# EAGLE board 1s (EAGLE 9.1.1)
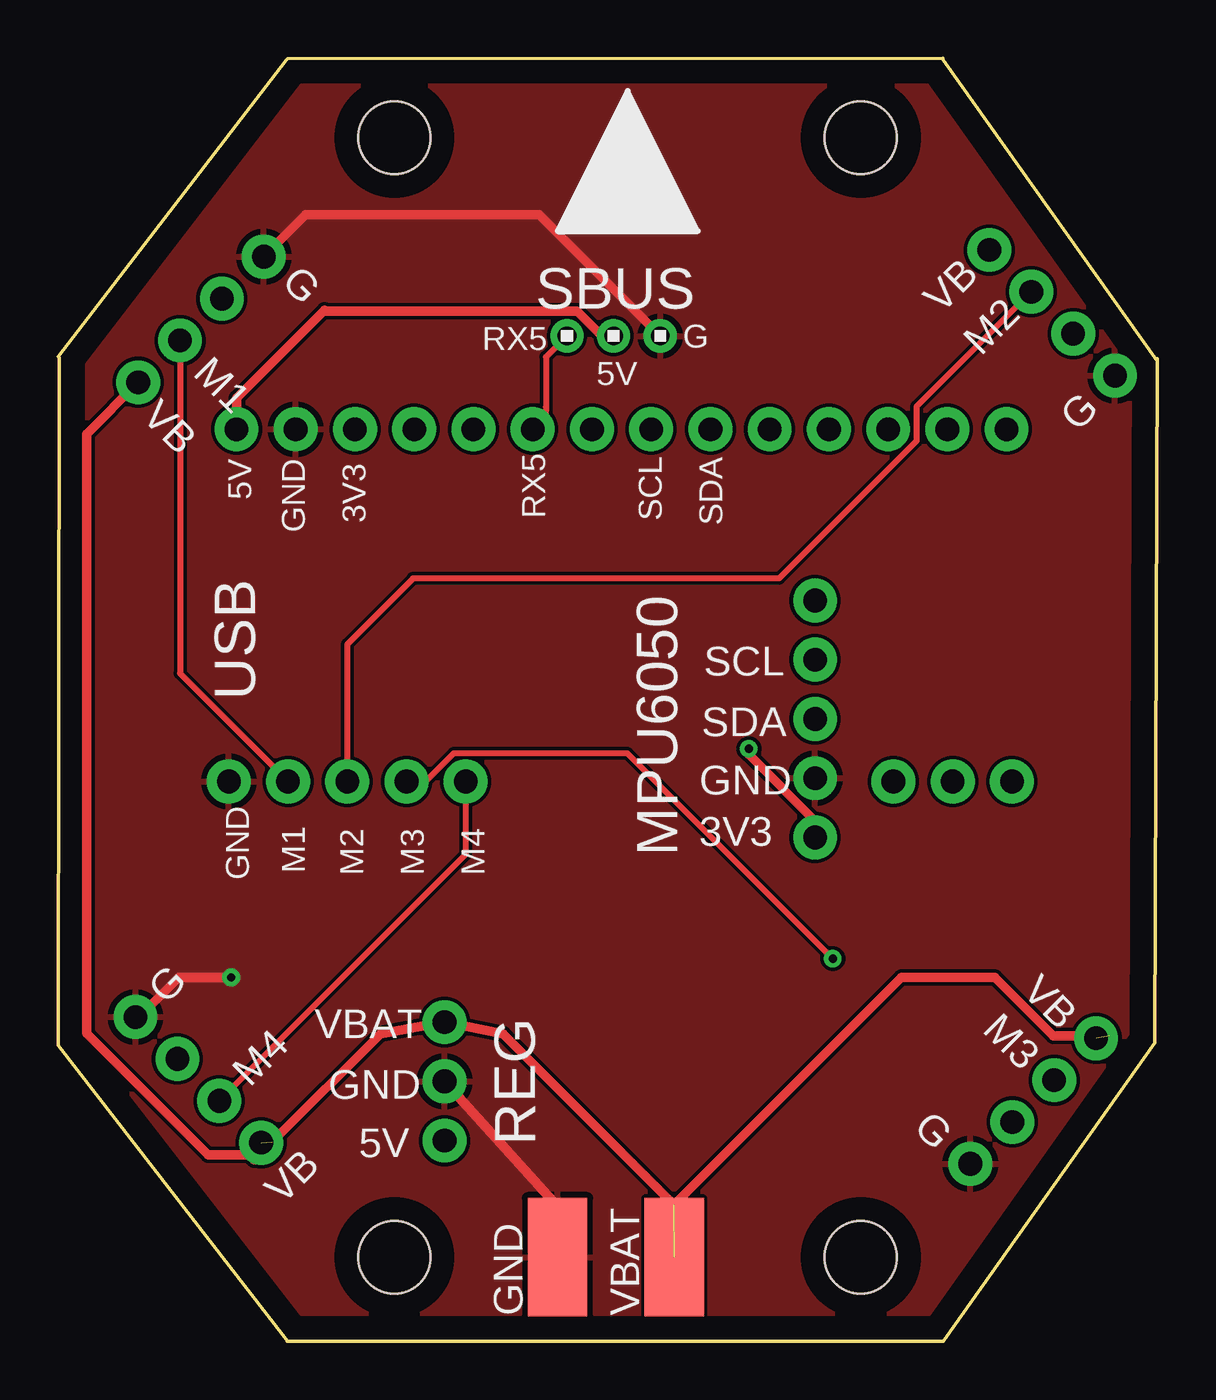
[diagram p0: board, top side]
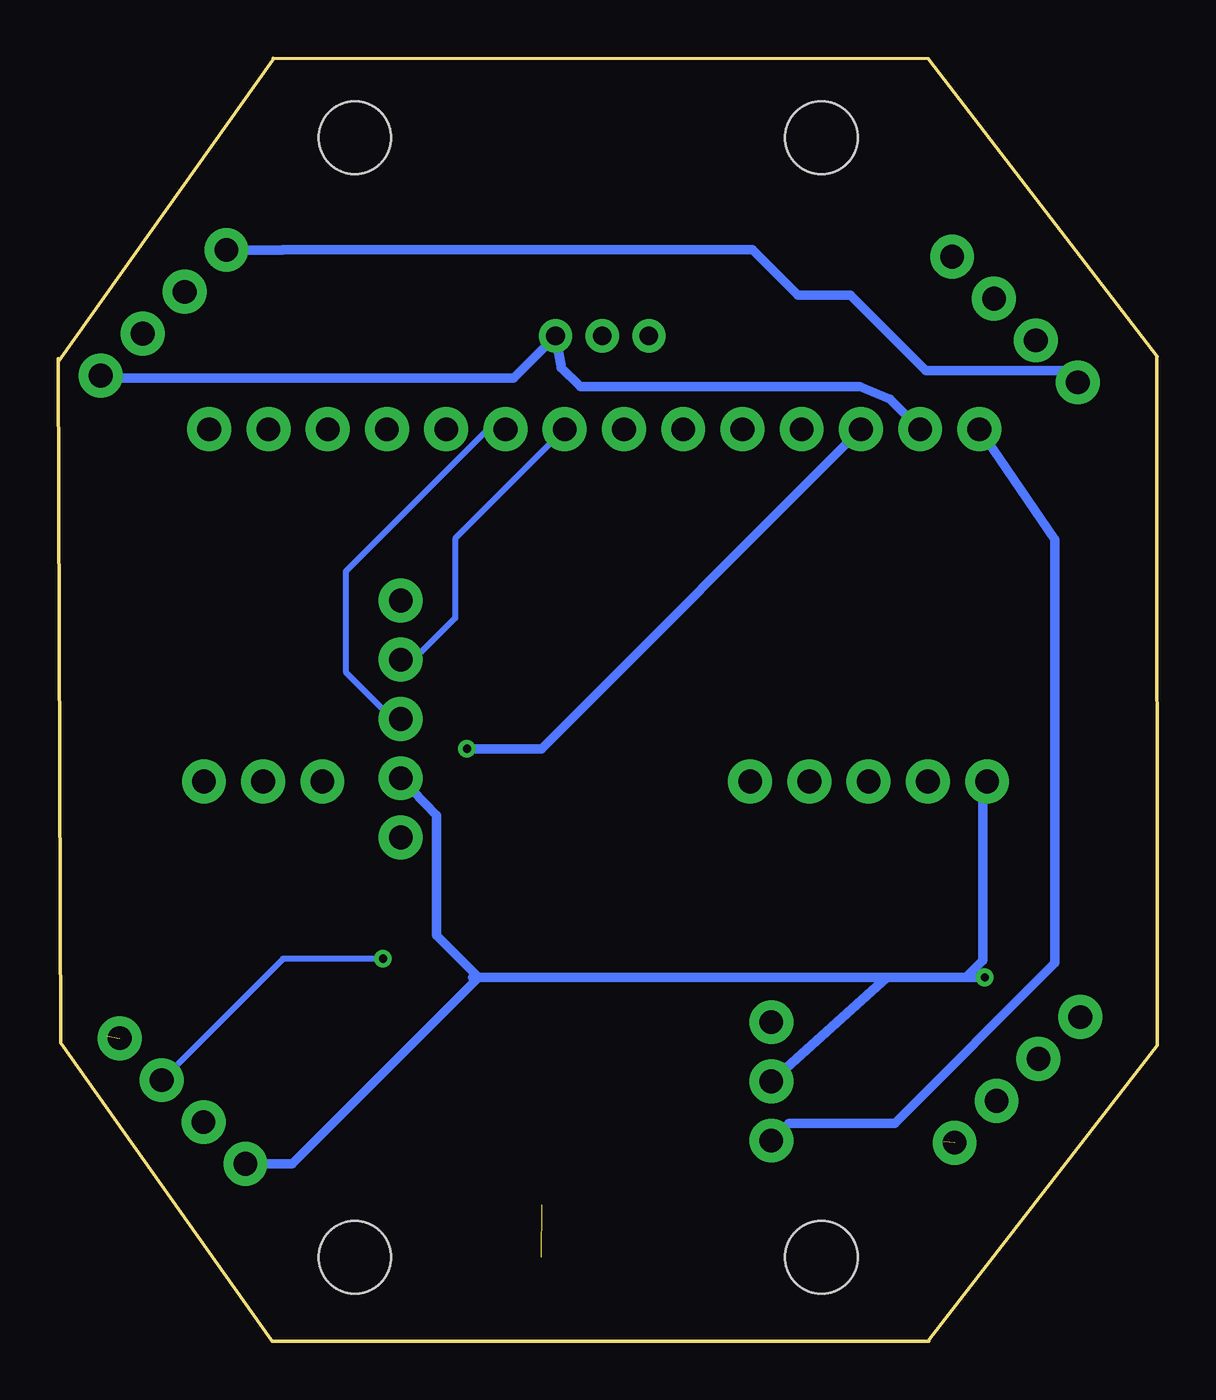
[diagram p1: board, bottom side, seen from below]

Size 47.13 x 55 mm. Coordinates in mm from the lower left corner, seen from the top.
Outline: 9.81,0 37.96,0
Outline: 37.93,55 9.83,55
Outline: 47.12,42.01 37.94,54.92
Outline: 0,42.21 9.78,54.92
Outline: 47.13,42.12 47.02,12.79 38,0.06
Outline: 0.03,42.18 0,12.69 9.78,0.08
Copper layers (1*16): Top 0.035mm / dielectric 1.5mm / Bottom 0.035mm
Design rules "default": minimum track width 6mil, minimum drill 0.35mm, track to track 6mil, track to pad 6mil, pad to pad 6mil, via to via 6mil, smd to smd 6mil, copper to edge 40mil, drill to drill 6mil, minimum pad ring 10mil, minimum via ring 8mil, stop-mask expansion 4mil, vias tented up to drill 0mil, thermal gap 10mil
Holes 3.1 mm at 14.41,51.6 34.41,51.6 34.41,3.6 14.41,3.6

## Footprints (pad centres in the part's own frame; a part is rotated, then mirrored left to right if it is on the bottom)
SMD2,54-5,08 = smd 2.54 x 5.08: 1 0,0
1X14_NO_SILK = drill 1.016 pad 1.88: 1 0,0; 2 2.54,0; 3 5.08,0; 4 7.62,0; 5 10.16,0; 6 12.7,0; 7 15.24,0; 8 17.78,0; 9 20.32,0; 10 22.86,0; 11 25.4,0; 12 27.94,0; 13 30.48,0; 14 33.02,0
1X05_NO_SILK = drill 1.016 pad 1.88: 1 0,0; 2 2.54,0; 3 5.08,0; 4 7.62,0; 5 10.16,0
1X03_NO_SILK = drill 1.016 pad 1.88: 1 0,0; 2 2.54,0; 3 5.08,0
1X04_NO_SILK = drill 1.016 pad 1.88: 1 0,0; 2 2.54,0; 3 5.08,0; 4 7.62,0
1X3 = drill 0.8 pad 1.422: 1 -2,0; 2 0,0; 3 2,0

## Placement (x,y rotation side)
GND  [SMD2,54-5,08]  21.41,3.6 0 top
J1  [1X14_NO_SILK]  40.66,39.1 180 top
J2  [1X05_NO_SILK]  7.31,24 0 top
J3  [1X03_NO_SILK]  35.81,24 0 top
M1  [1X04_NO_SILK]  8.81,46.5 225 top
M2  [1X04_NO_SILK]  45.31,41.4 135 top
M3  [1X04_NO_SILK]  39.11,7.6 45 top
M4  [1X04_NO_SILK]  3.31,13.9 315 top
MPU_9250  [1X05_NO_SILK]  32.45,21.6 90 top
REG  [1X03_NO_SILK]  16.56,8.6 90 top
SBUS_RX  1X3  [1X3]  23.81,43.1 180 top
VBAT  [SMD2,54-5,08]  26.41,3.6 0 top

## Library data of the parts
GND VBAT = wirepad
J1-J3 MPU_9250 REG = SparkFun-Connectors
M1-M4 = SparkFun-Connectors; PROD_ID: CONN-09696
SBUS_RX = headers(2mm)

## Nets
3V3: J1.12 MPU_9250.1
5V: J1.14 REG.1 SBUS_RX.2
CS: J3.1
GND: GND.1 J1.13 J2.1 M1.1 M2.1 M3.1 M4.1 MPU_9250.2 REG.2 SBUS_RX.1
INT: MPU_9250.5
M1: J2.2 M1.3
M2: J2.3 M2.3
M3: J2.4 M3.3
M4: J2.5 M4.3
MISO: J3.3
MOSI: J3.2
RX5: J1.9 SBUS_RX.3
SCL: J1.7 MPU_9250.4
SDA: J1.6 MPU_9250.3
VBAT: M1.4 M2.4 M3.4 M4.4 REG.3 VBAT.1

## Tracks (layer width: path | path; a pad name or v marks a point on that pad's centre or on a via)
3V3  (via drill 0.35)
  Top 0.406: v29.61,25.4 29.61,25.15 32.45,22.31 MPU_9250.1
  Bottom 0.406: J1.12 26.42,25.4 v29.61,25.4
5V
  Top 0.406: SBUS_RX.2 23.32,43.1 22.25,44.17 11.44,44.17 11.41,44.2 7.64,40.43 J1.14
  Bottom 0.406: J1.14 4.41,34.37 4.41,16.21 11.27,9.35 15.81,9.35 REG.1
GND  (via drill 0.35)
  Top 0.254: v7.41,15.6 6.57,15.6
  Top 0.406: GND.1 21.41,5.79 REG.2 | SBUS_RX.1 20.61,48.3 10.61,48.3 M1.1 | v7.41,15.6 5.16,15.6 3.46,13.9 M4.1
  Bottom 0.406: v7.41,15.6 8.21,15.6 | 8.21,15.6 11.6,15.6 | 11.6,15.6 REG.2 | 11.6,15.6 29.11,15.6 | 29.11,15.6 29.36,15.6 | J1.13 11.47,40.39 12.76,40.93 24.75,40.93 25.57,41.75 25.57,41.86 SBUS_RX.1 27.61,41.3 45.41,41.3 | 8.21,15.6 7.49,16.32 7.49,23.68 7.91,24.1 | 29.11,15.6 30.9,17.4 30.9,22.53 MPU_9250.2 | M3.1 37.11,7.6 29.11,15.6
  pour Top: 9.66,58.35 36.66,58.35 50.91,44.1 50.91,7.6 41.41,-1.9 7.91,-1.9 -5.09,11.1 -5.09,43.6
M1
  Top 0.254: M1.3 5.22,28.63 J2.2
M2
  Top 0.254: M2.3 36.8,40.07 36.8,38.59 30.9,32.7 15.21,32.7 12.39,29.88 J2.3
M3  (via drill 0.35)
  Top 0.254: J2.4 15.75,24 16.96,25.22 24.39,25.22 v33.21,16.4
  Bottom 0.254: v33.21,16.4 37.49,16.4 M3.3
M4
  Top 0.254: J2.5 17.47,20.88 M4.3
RX5
  Top 0.254: J1.9 20.9,39.66 20.91,40.07 20.91,42.2 SBUS_RX.3
SCL
  Bottom 0.254: J1.7 30.11,34.41 30.11,31 31.89,29.22 MPU_9250.4
SDA
  Bottom 0.254: J1.6 28.71,39.1 34.81,33 34.81,28.7 32.79,26.68 MPU_9250.3
VBAT  (3 unrouted)
  Top 0.406: 8.62,7.99 9.17,8.54 13.81,13.18 REG.3 19.06,13.18 26.4,5.84 36.16,15.6 40.16,15.6 42.66,13.1 45.06,13.1 | 8.62,7.99 8.41,7.78 8.39,7.78 | M1.4 1.21,38.9 1.21,13.2 6.42,7.99 8.62,7.99
  Bottom 0.406: 3.31,41 M1.4 3.92,41.61 9.92,41.61 13.16,44.85 15.41,44.85 17.36,46.8 37.51,46.8 37.52,46.79 M2.4

## Text on the board
tPlace: G | SBUS | VB | RX5 | G | M2 | M1 | 5V | VB | G | 5V | RX5 | SCL | GND | 3V3 | SDA | SCL | USB | SDA | GND | 3V3 | MPU6050 | GND | M1 | M2 | M3 | M4 | G | VB | M3 | VBAT | M4 | GND | REG | G | 5V | VB